# EAGLE board SMD0503 (EAGLE 6.3)
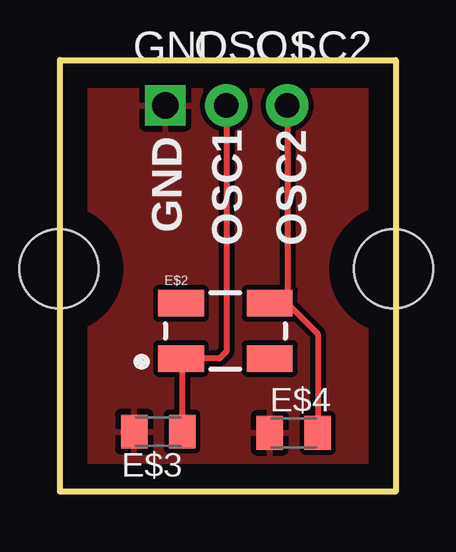
[diagram p0: board, top side]

Size 14 x 18 mm. Coordinates in mm from the lower left corner, seen from the top.
Outline: 0,0 0,18 14,18 14,0 0,0
Copper layers (1*16): Top 0.035mm / dielectric 1.5mm / Bottom 0.035mm
Design rules "default": minimum track width 10mil, minimum drill 24mil, track to track 8mil, track to pad 8mil, pad to pad 8mil, via to via 8mil, smd to smd 8mil, copper to edge 40mil, drill to drill 8mil, minimum pad ring 10mil, minimum via ring 8mil, stop-mask expansion 4mil, vias tented up to drill 0mil, thermal gap 10mil

## Footprints (pad centres in the part's own frame; a part is rotated, then mirrored left to right if it is on the bottom)
CRYSTAL-OSC-SMD-5X3 = smd 1.9 x 1.1: 1 -1.85,-1.15; 2 1.85,-1.15; 3 1.85,1.15; 4 -1.85,1.15
C0805K = smd 1.1 x 1.4: 1 -1,0; 2 1,0
1X01 = drill 1.1 pad 1.676 square: 1 0,0
STAND-OFF = hole 3.302: 0,0
1X01-CLEANBIG = drill 1.016 pad 1.778: 1 0,0

## Placement (x,y rotation side)
E$2  [CRYSTAL-OSC-SMD-5X3]  6.9,6.7 0 top
E$3  [C0805K]  4.1,2.5 180 top
E$4  [C0805K]  9.75,2.45 0 top
GND  [1X01]  4.4,16.1 0 top
JP3  STAND-OFF  [STAND-OFF]  13.91,9.29 0 top
JP4  STAND-OFF  [STAND-OFF]  -0.04,9.29 0 top
OSC1  [1X01-CLEANBIG]  6.94,16.11 0 top
OSC2  [1X01-CLEANBIG]  9.48,16.11 0 top

## Library data of the parts
E$2 JP3 JP4 = SparkFun
E$3 E$4 OSC1 OSC2 = adafruit
GND = adafruit_4u

## Nets
GND: E$3.2 E$4.1 GND.1
OSC1: E$2.1 E$3.1 OSC1.1
OSC2: E$2.3 E$4.2 OSC2.1

## Tracks (layer width: path | path; a pad name or v marks a point on that pad's centre or on a via)
GND
  pour Top: 0.15,17.7 13.7,17.7 13.75,0.45 0.3,0.45 0.2,17.65
OSC1
  Top 0.254: E$3.1 5.1,5.5 E$2.1 6.65,5.55 6.94,5.84 OSC1.1
OSC2
  Top 0.254: OSC2.1 9.48,7.85 | 9.48,7.85 E$2.3 | 9.48,7.85 10.75,6.58 E$4.2

## Text on the board
_tsilk: GND | OSC1 | OSC2
_bsilk: quilix.com | SMD0503